# Altium PCB HBRIDGE_PCB.PcbDoc (part 1 of 2)
Units mm, origin at the board's own origin, x right, y up, seen from the top; angles counter-clockwise.
Board outline 96 x 74 mm, 4 copper layers (Top Layer, GND, VCC, Bottom Layer), stack 1.602 mm thick; 114 components, 69 nets, 304 pads, 210 vias.
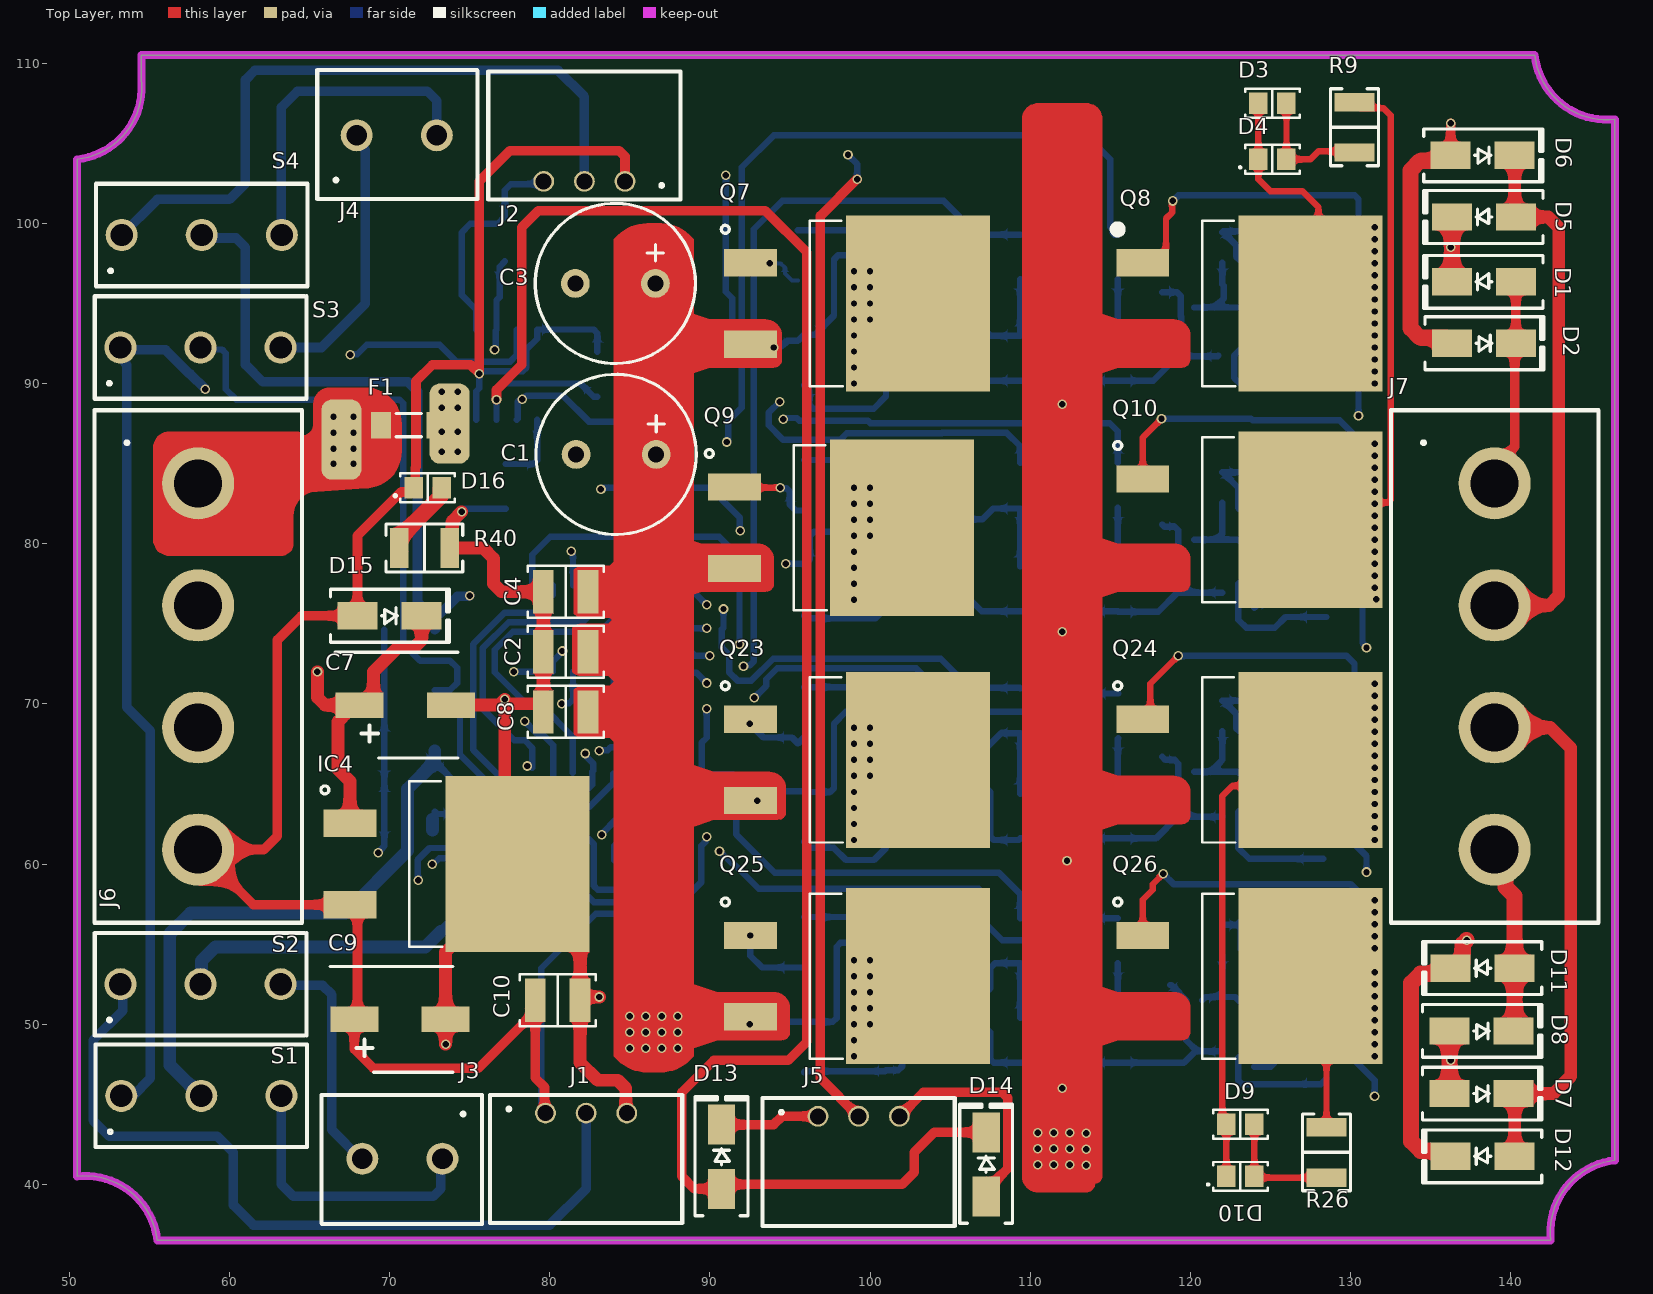
[diagram p0: Top Layer view]
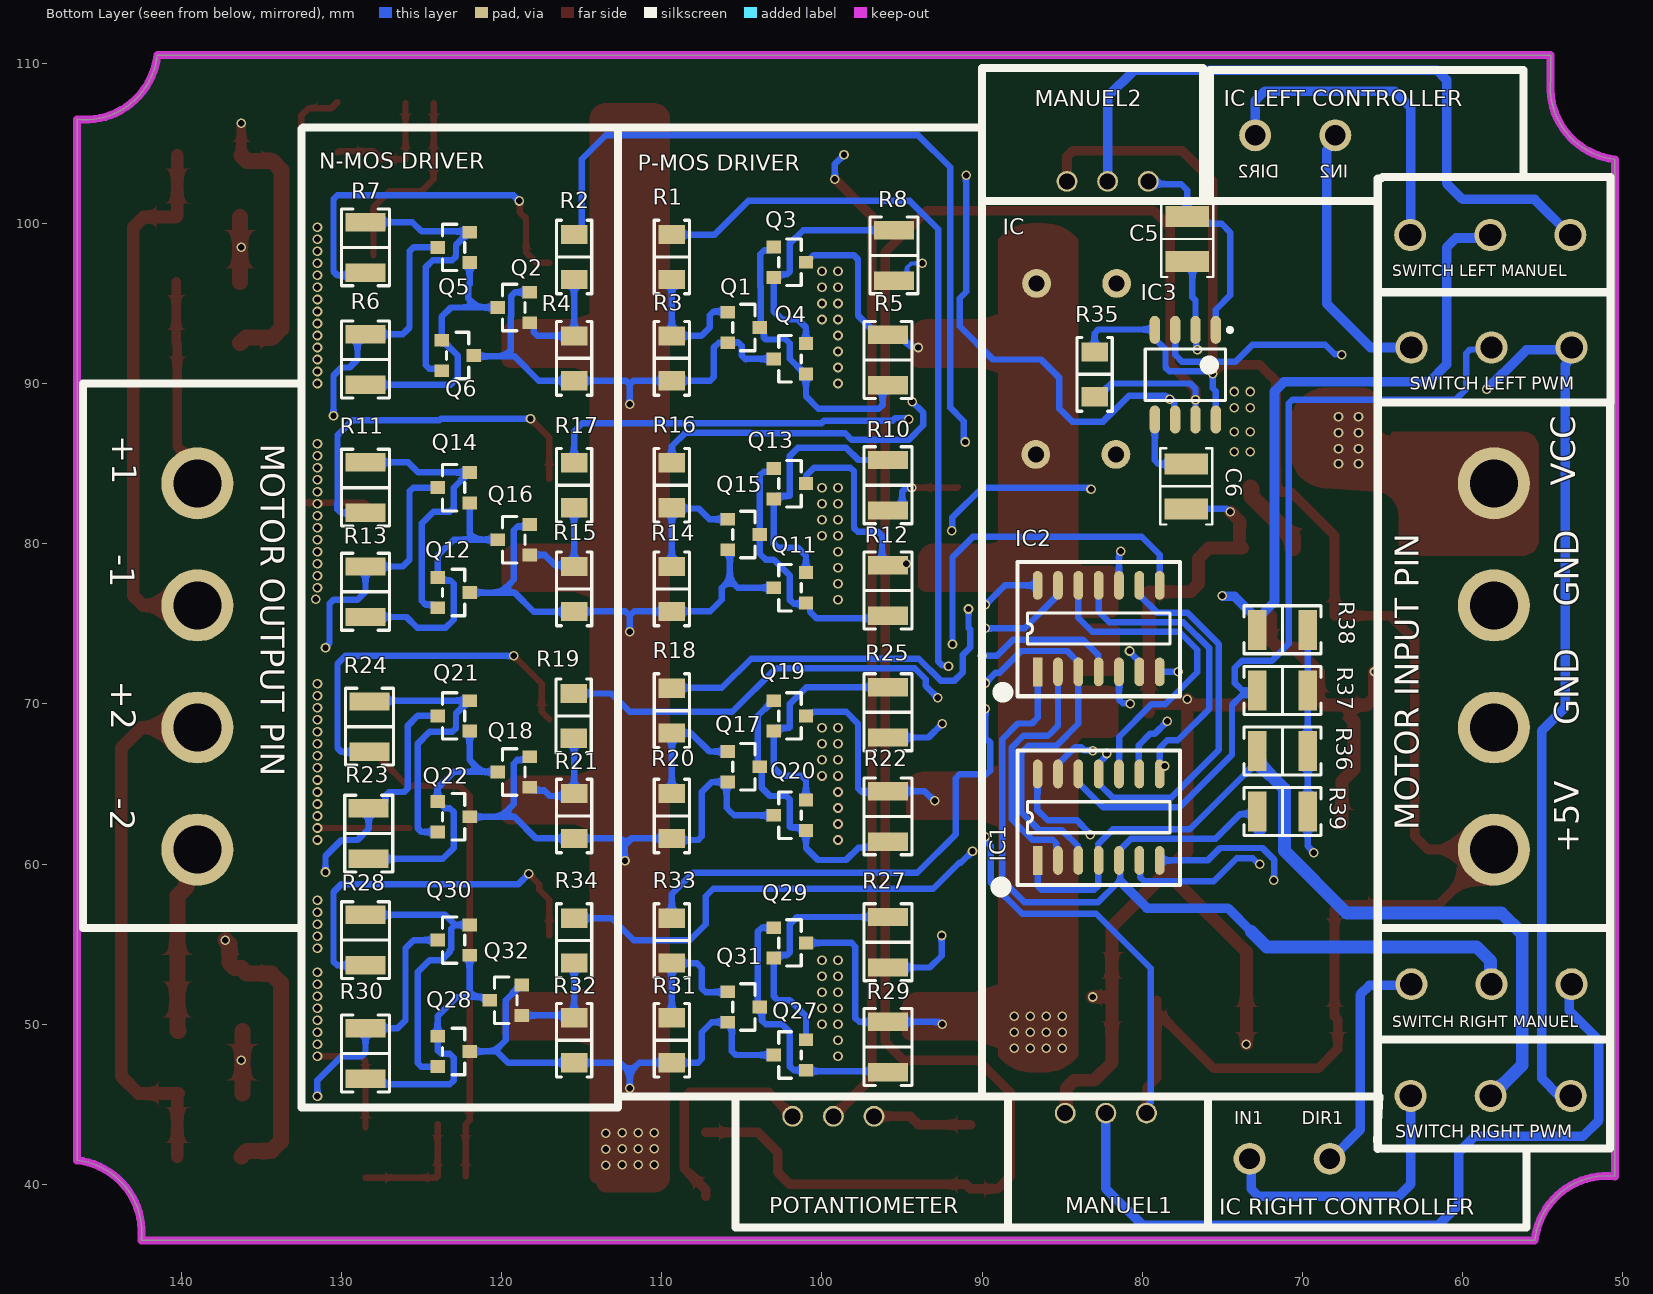
[diagram p1: Bottom Layer view, seen from below]
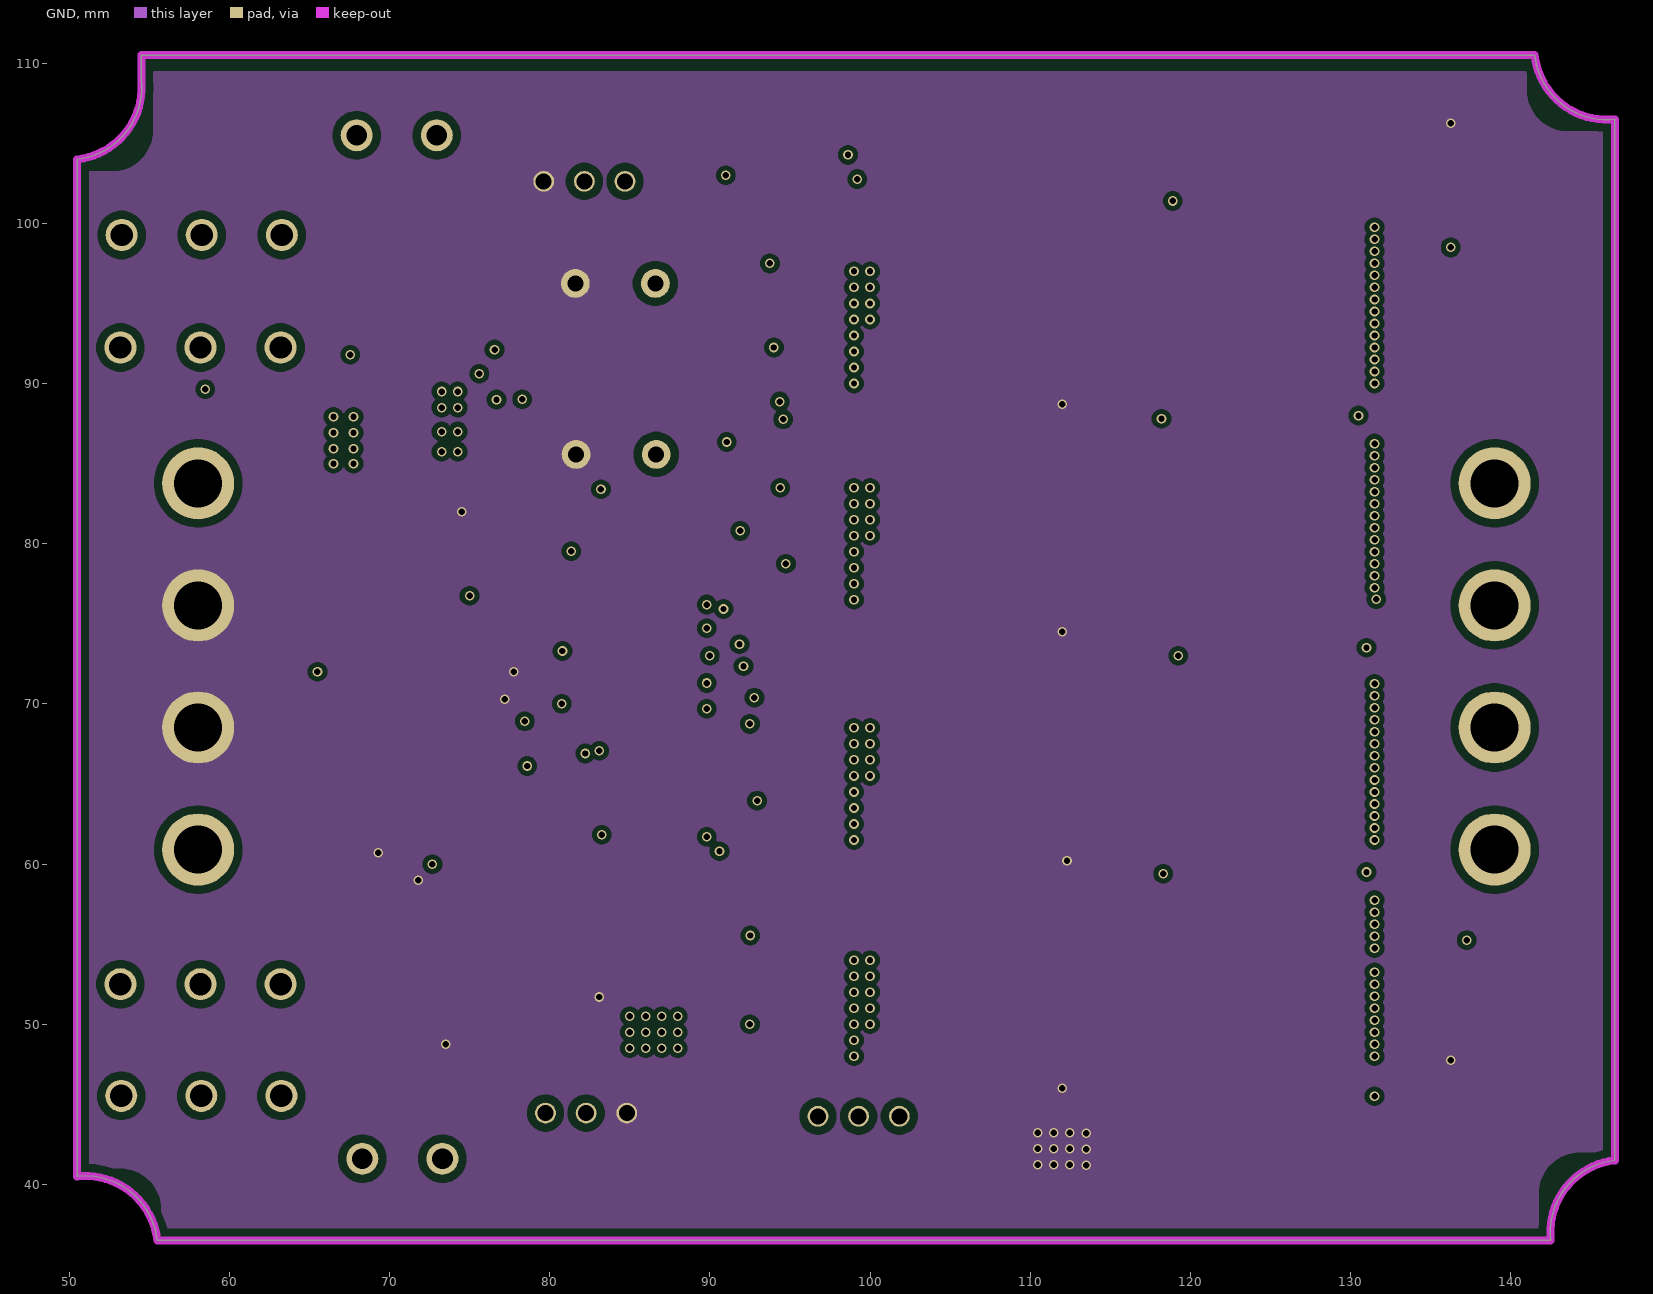
[diagram p2: GND]
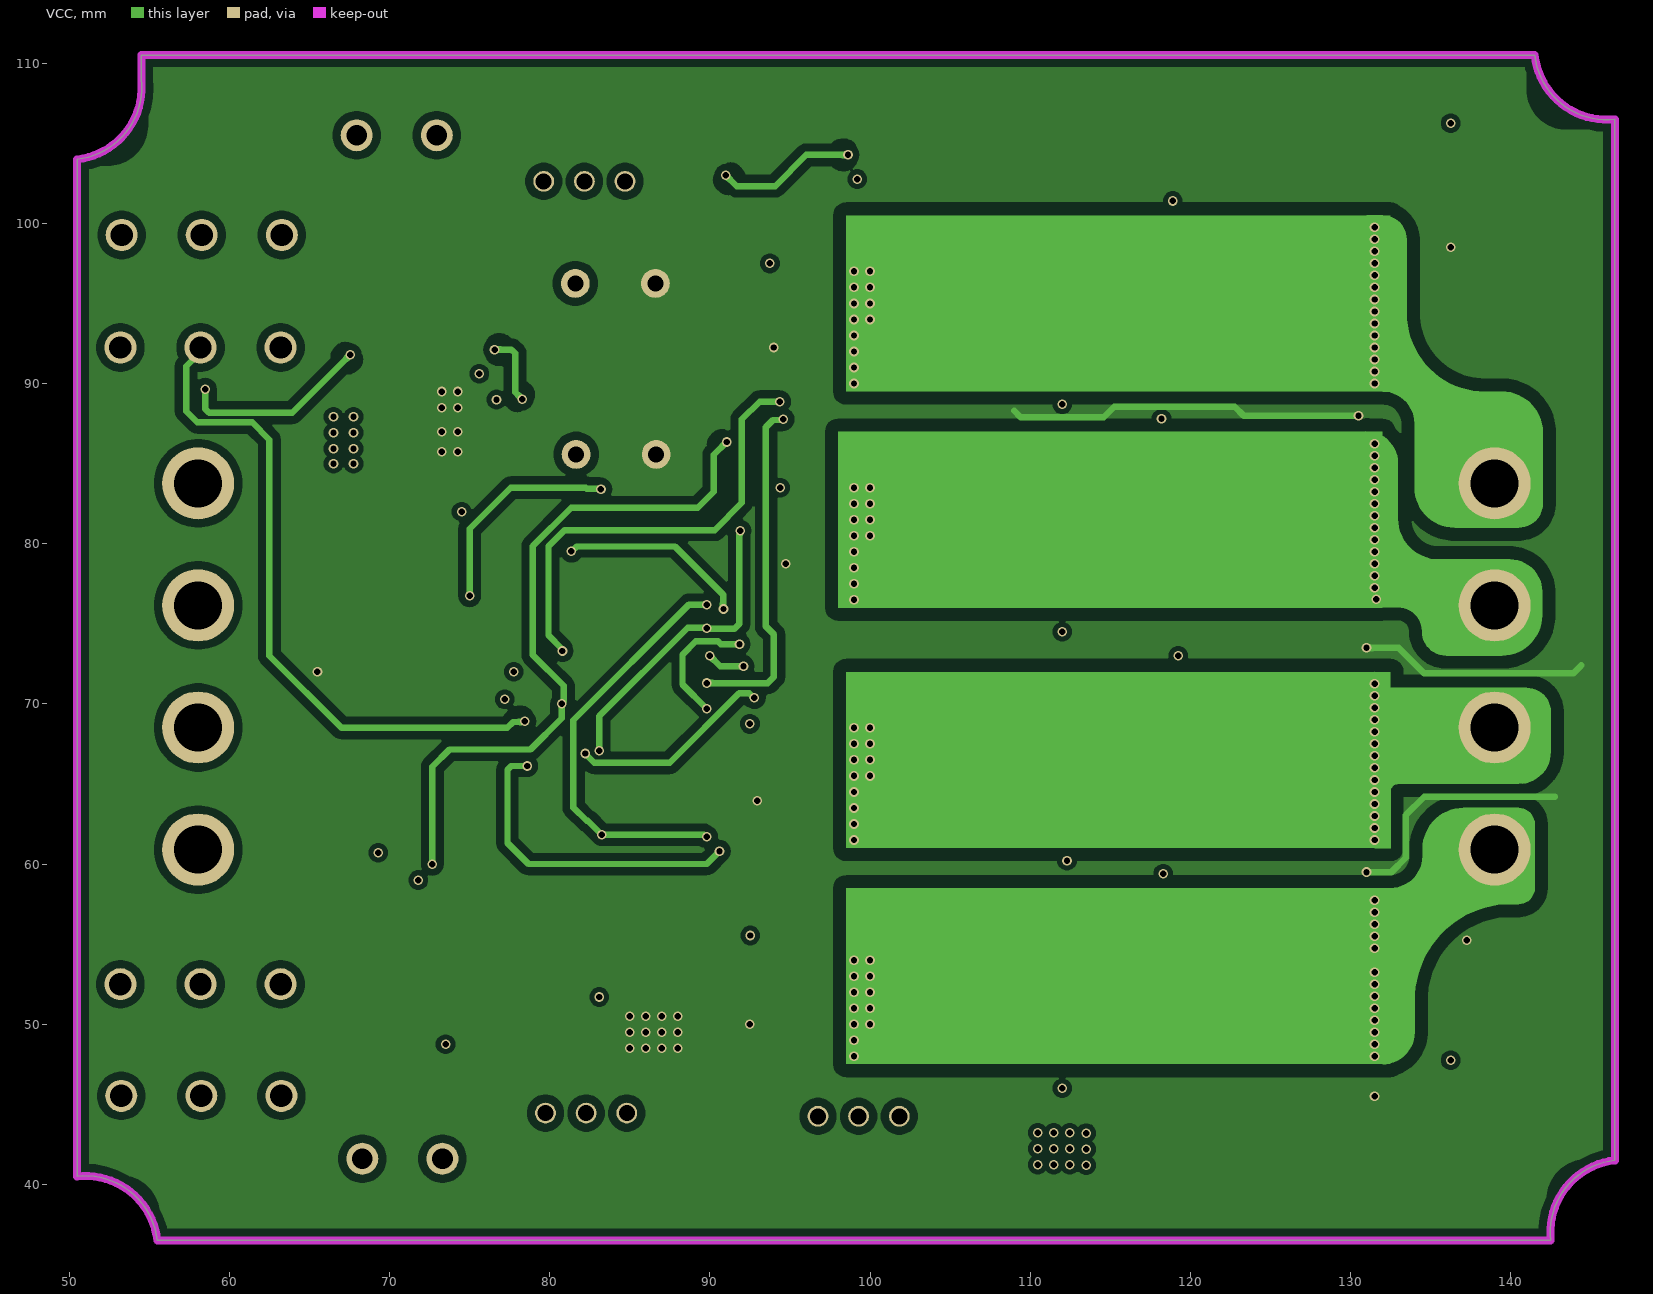
[diagram p3: VCC]
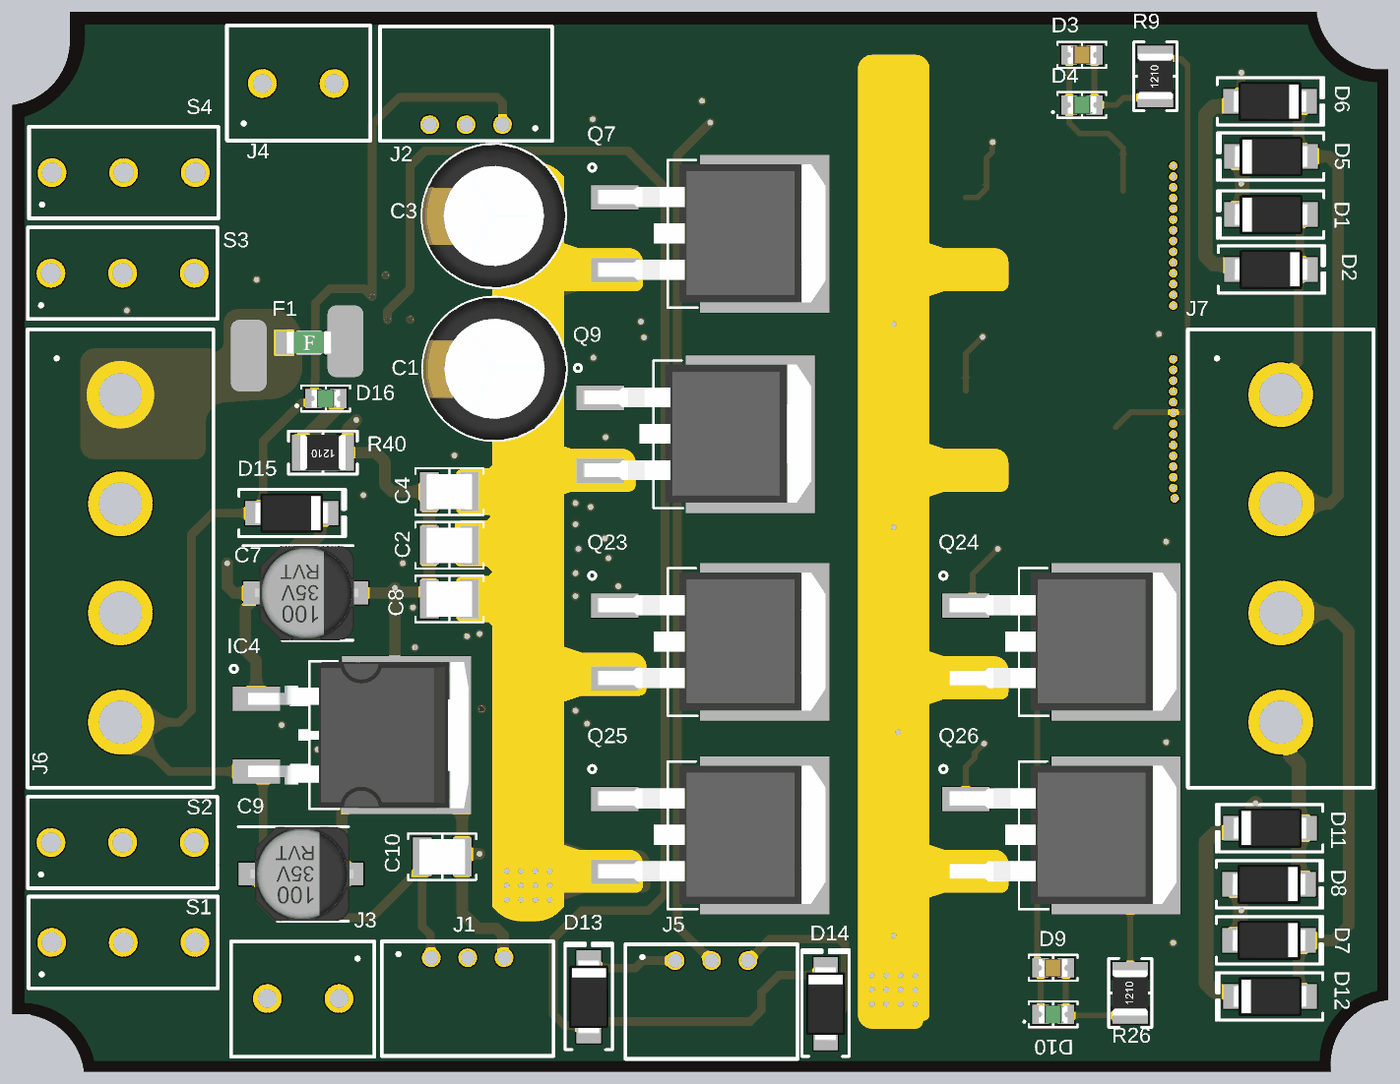
[diagram p5: 3D render of the assembled board from above, using the file's embedded part models]
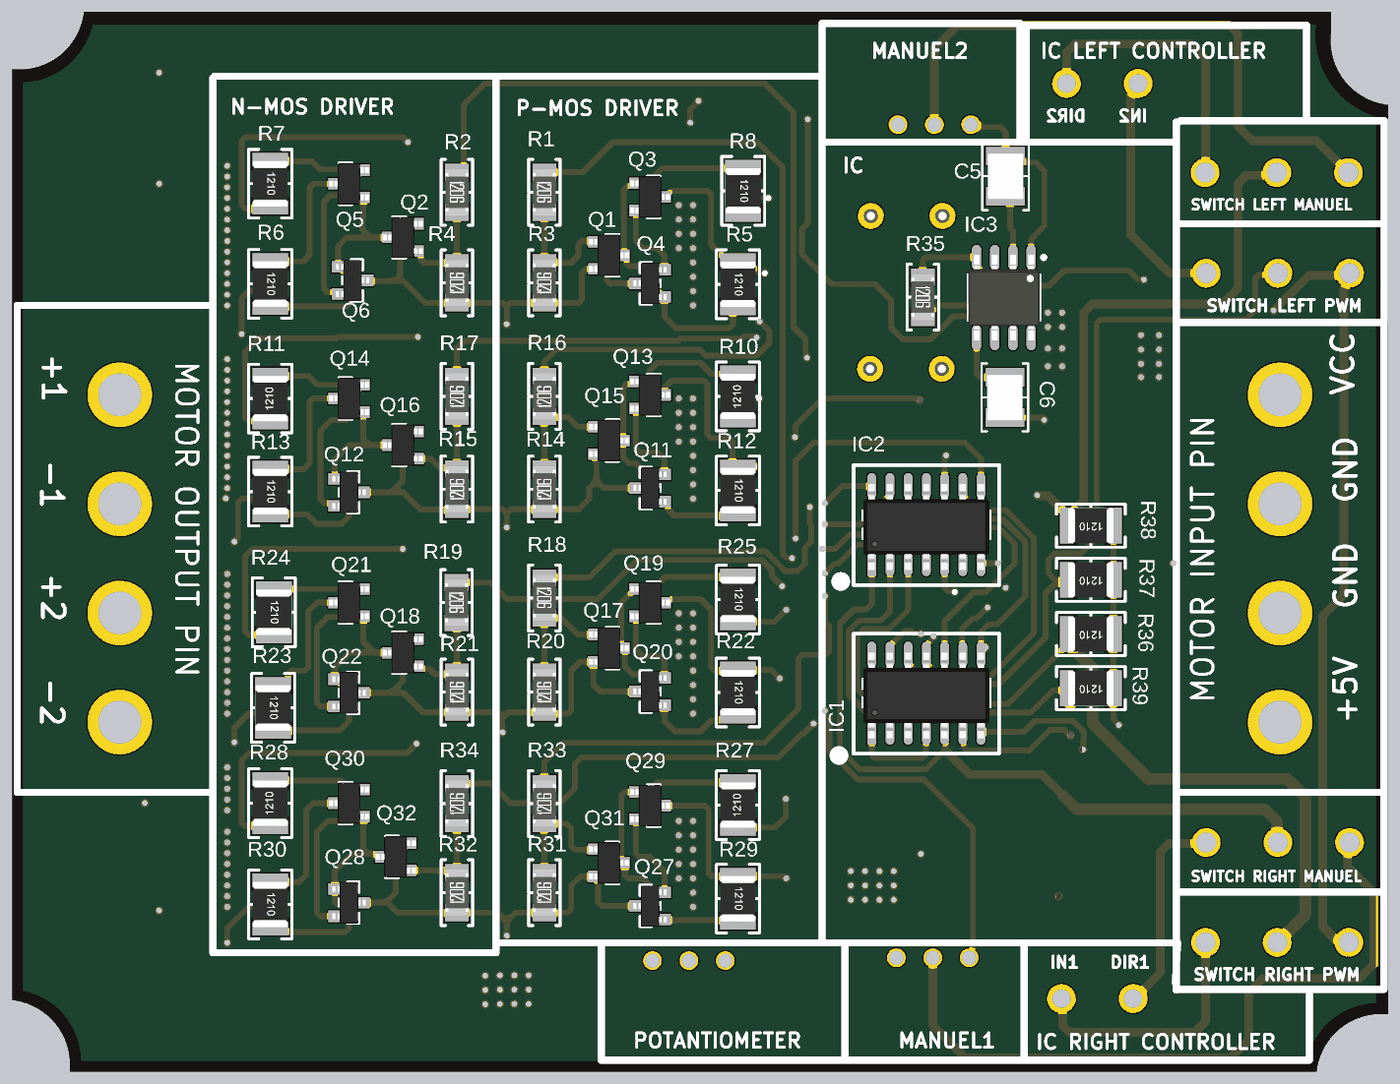
[diagram p6: 3D render of the assembled board from below, using the file's embedded part models]

## Layer stack, top to bottom
Top Solder: solder mask 0.0102, Solder Resist, Dk 3.5
Top Layer: signal copper 0.035
Dielectric 2: prepreg 0.2184, PP-023, Dk 4.4
GND: signal copper 0.0152
Dielectric 1: core 1.065, Core-042, Dk 4.6
VCC: signal copper 0.0152
Dielectric 3: prepreg 0.2184, PP-023, Dk 4.4
Bottom Layer: signal copper 0.035
Bottom Solder: solder mask 0.0102, Solder Resist, Dk 3.5

## Board outline
50.5,40.5 50.5,104 ccw(c50,108.5) 54.5,109 54.5,110.5 141.5,110.5 ccw(c146,111) 146.5,106.5 146.5,41.5 ccw(c147,37) 142.5,36.5 55.5,36.5 ccw(c51,36)

## Design rules (kind name [scope] priority, off if disabled: settings)
Clearance [All] p1: gap=0.2 ignorepadtopadclearanceinfootprint=FALSE except(0.127: SMDPad-SMDPad; 0.254: Arc-Via Track-Via Via-Via; 0.3: Via-Fill Via-Poly Via-Region; 0.35: Arc-THPad Track-THPad; 0.5: Arc-Fill Arc-Poly Arc-Region Track-Fill Track-Poly Track-Region SMDPad-Fill SMDPad-Poly SMDPad-Region THPad-THPad THPad-Fill THPad-Poly THPad-Region; 0.8: Fill-Fill Fill-Poly Fill-Region Poly-Poly Poly-Region Region-Region)
HoleSize [All] p1: absolutevalues=TRUE maxlimit=6.3 minlimit=0.3 maxpercent=80.000 minpercent=20.000
MinimumSolderMaskSliver [All] p1: minsoldermaskwidth=0.05
PlaneClearance [All] p1: clearance=1
PlaneConnect [All] p1: planeconnectstyle=Relief reliefexpansion=0.508 reliefentries=4 reliefconductorwidth=0.254 reliefairgap=5
PolygonConnect [All] p1: connectstyle=Direct reliefconductorwidth=0.7 reliefentries=4 polygonreliefangle="90 Angle" airgapwidth=1
RoutingVias [All] p1: holewidth=1.5 width=3 viastyle="Through Hole" minholewidth=0.3 minwidth=0.5 maxholewidth=6.3 maxwidth=6
SilkToSilkClearance [All vs IsText] p1: silktosilkclearance=0.08
SilkToSolderMaskClearance [IsText] p1: minsilkscreentomaskgap=0.08 clearancetoexposedcopper=TRUE
SolderMaskExpansion [All] p1: expansion=0.102 istentingtop=FALSE
UnRoutedNet [All] p1: checkbadconnections=TRUE
Width [All] p1: maxlimit=3 minlimit=0.2 preferedwidth=0.5 minimp=50.000000 maximp=50.000000 favimp=50.000000
23 further rules are at their usual default settings.

## Components (designator, comment, footprint, x,y, rotation, side; value= is the part's Value field where it differs from the comment)
C1 "35V 1000uF" "35V 1000uF" 86.65,85.575 r180 top
C2 "0.1 µF" "CAP 1210_3225 - 1MM" 81,73.25 r0 top
C3 "35V 1000uF" "35V 1000uF" 86.6,96.25 r180 top
C4 "0.1 µF" "CAP 1210_3225 - 1MM" 81,77 r0 top
C5 "0.1 µF" "CAP 1210_3225 - 1MM" 77.2,99.025 r270 bottom
C6 "0.1 µF" "CAP 1210_3225 - 1MM" 77.25,83.575 r90 bottom
C7 "Aluminum Cap" "Aluminum Cap" 68.125,69.925 r0 top
C8 "0.1 µF" "CAP 1210_3225 - 1MM" 81,69.5 r0 top
C9 "Aluminum Cap" "Aluminum Cap" 67.8,50.3 r0 top
C10 "0.1 µF" "CAP 1210_3225 - 1MM" 80.5,51.5 r180 top
D1 "IN4007" "DO214AC SMA" 138.325,96.35 r180 top
D2 "IN4007" "DO214AC SMA" 138.325,92.517 r0 top
D3 "Led" LED_RED 126,107.5 r180 top
D4 "LED_GREEN" LED_GREEN 124.25,104 r0 top
D5 "IN4007" "DO214AC SMA" 138.325,100.4 r180 top
D6 "IN4007" "DO214AC SMA" 138.25,104.25 r0 top
D7 "IN4007" "DO214AC SMA" 138.25,41.75 r180 top
D8 "IN4007" "DO214AC SMA" 138.183,45.667 r0 top
D9 "Led" LED_RED 124,43.75 r180 top
D10 "LED_GREEN" LED_GREEN 122.25,40.5 r0 top
D11 "IN4007" "DO214AC SMA" 138.25,53.5 r180 top
D12 "IN4007" "DO214AC SMA" 138.183,49.583 r0 top
D13 "IN4007" "DO214AC SMA" 90.725,41.725 r90 top
D14 "IN4007" "DO214AC SMA" 107.25,41.25 r90 top
D15 "IN4007" "DO214AC SMA" 70,75.5 r0 top
D16 "LED_GREEN" LED_GREEN 71.5,83.5 r0 top
F1 "30A" "FUSE 1206_3216 0.6MM" 71.2,87.4 r0 top
IC1 "74HC132" SOIC14 86.535,60.225 r90 bottom
IC2 "CD4069UBD" SOIC14 86.535,72 r90 bottom
IC3 "NE555" NE5532-SOIC8 75.41,93.344 r270 bottom
IC4 "L7805CD2T" L7805CD2T 67.528,62.54 r270 top
J1 "Switch" "JST-XH 2.54 - duplicate" 79.735,44.45 r0 top
J2 "Switch" "JST-XH 2.54 - duplicate" 84.705,102.625 r180 top
J3 "klemens1" Klemens 73.3,41.6 r180 top
J4 "klemens2" Klemens 67.95,105.5 r0 top
J5 "Pot" "JST-XH 2.54" 96.75,44.25 r0 top
J6 "Power klemens" "Power Klemens" 58.05,83.765 r270 top
J7 "Motor Klemens" "Power Klemens" 139,83.765 r270 top
Q1 "2N3904" "DIODES SOT-23-3" 104.875,93.5 r180 bottom
Q2 "2N3904" "DIODES SOT-23-3" 119.25,94.75 r0 bottom
Q3 "2N3904" "DIODES SOT-23-3" 102,97.575 r180 bottom
Q4 "2N3906S" SOT23-3 101.014,90.575 r0 bottom
Q5 "2N3904" "DIODES SOT-23-3" 123,98.5 r0 bottom
Q6 "2N3906S" SOT23-3 123.736,92.716 r180 bottom
Q7 "IRF4905" IRF4905 92.528,97.54 r270 top
Q8 "IRF3205S" IRF3205S 117.678,136.187 r270 top
Q9 "IRF4905" IRF4905 91.528,83.54 r270 top
Q10 "IRF3205S" IRF3205S 117.678,122.687 r270 top
Q11 "2N3906S" SOT23-3 101.014,76.284 r0 bottom
Q12 "2N3906S" SOT23-3 123.986,77.916 r180 bottom
Q13 "2N3904" "DIODES SOT-23-3" 102,83.75 r180 bottom
Q14 "2N3904" "DIODES SOT-23-3" 123,83.5 r0 bottom
Q15 "2N3904" "DIODES SOT-23-3" 104.875,80.575 r180 bottom
Q16 "2N3904" "DIODES SOT-23-3" 119.25,80.25 r0 bottom
Q17 "2N3904" "DIODES SOT-23-3" 104.875,66.075 r180 bottom
Q18 "2N3904" "DIODES SOT-23-3" 119.25,65.75 r0 bottom
Q19 "2N3904" "DIODES SOT-23-3" 102,69.25 r180 bottom
Q20 "2N3906S" SOT23-3 101.014,62.075 r0 bottom
Q21 "2N3904" "DIODES SOT-23-3" 123,69.25 r0 bottom
Q22 "2N3906S" SOT23-3 123.986,63.916 r180 bottom
Q23 "IRF4905" IRF4905 92.528,69.04 r270 top
Q24 "IRF3205S" IRF3205S 117.678,107.687 r270 top
Q25 "IRF4905" IRF4905 92.528,55.54 r270 top
Q26 "IRF3205S" IRF3205S 117.678,94.187 r270 top
Q27 "2N3906S" SOT23-3 101.014,47.109 r0 bottom
Q28 "2N3906S" SOT23-3 123.986,49.266 r180 bottom
Q29 "2N3904" "DIODES SOT-23-3" 102,55.075 r180 bottom
Q30 "2N3904" "DIODES SOT-23-3" 123,55.25 r0 bottom
Q31 "2N3904" "DIODES SOT-23-3" 104.875,51.075 r180 bottom
Q32 "2N3904" "DIODES SOT-23-3" 119.75,51.5 r0 bottom
R1 "1 kOhms" "RES 1206_3216" 109.375,97.9 r270 bottom
R2 "1 kOhms" "RES 1206_3216" 115.475,97.9 r270 bottom
R3 "10 kOhms" "RES 1206_3216" 109.375,91.575 r90 bottom
R4 "10 kOhms" "RES 1206_3216" 115.475,91.575 r90 bottom
R5 "10 kOhms" "RES 1210_3225" 95.875,91.475 r270 bottom
R6 "10 kOhms" "RES 1210_3225" 128.5,91.5 r270 bottom
R7 "10 kOhms" "RES 1210_3225" 128.5,98.5 r270 bottom
R8 "10 kOhms" "RES 1210_3225" 95.5,98 r270 bottom
R9 "1.5KOhms" "RES 1210_3225" 130.25,106 r90 top value="10 kOhms"
R10 "10 kOhms" "RES 1210_3225" 95.875,83.65 r90 bottom
R11 "10 kOhms" "RES 1210_3225" 128.5,83.5 r90 bottom
R12 "10 kOhms" "RES 1210_3225" 95.875,77.075 r270 bottom
R13 "10 kOhms" "RES 1210_3225" 128.5,77 r270 bottom
R14 "10 kOhms" "RES 1206_3216" 109.375,77.175 r90 bottom
R15 "10 kOhms" "RES 1206_3216" 115.475,77.175 r90 bottom
R16 "1 kOhms" "RES 1206_3216" 109.375,83.65 r90 bottom
R17 "1 kOhms" "RES 1206_3216" 115.475,83.65 r90 bottom
R18 "1 kOhms" "RES 1206_3216" 109.375,69.575 r270 bottom
R19 "1 kOhms" "RES 1206_3216" 115.5,69.25 r270 bottom
R20 "10 kOhms" "RES 1206_3216" 109.375,63 r90 bottom
R21 "10 kOhms" "RES 1206_3216" 115.475,63 r90 bottom
R22 "10 kOhms" "RES 1210_3225" 95.875,62.975 r270 bottom
R23 "10 kOhms" "RES 1210_3225" 128.3,61.9 r270 bottom
R24 "10 kOhms" "RES 1210_3225" 128.25,68.575 r270 bottom
R25 "10 kOhms" "RES 1210_3225" 95.875,69.475 r270 bottom
R26 "1.5KOhms" "RES 1210_3225" 128.5,42 r90 top value="10 kOhms"
R27 "10 kOhms" "RES 1210_3225" 95.875,55.118 r90 bottom
R28 "10 kOhms" "RES 1210_3225" 128.5,55.25 r90 bottom
R29 "10 kOhms" "RES 1210_3225" 95.875,48.575 r270 bottom
R30 "10 kOhms" "RES 1210_3225" 128.5,48.175 r270 bottom
R31 "10 kOhms" "RES 1206_3216" 109.375,49 r90 bottom
R32 "10 kOhms" "RES 1206_3216" 115.475,49 r90 bottom
R33 "1 kOhms" "RES 1206_3216" 109.375,55.218 r90 bottom
R34 "1 kOhms" "RES 1206_3216" 115.475,55.218 r90 bottom
R35 "1 kOhms" "RES 1206_3216" 82.975,90.575 r270 bottom
R36 "10 kOhms" "RES 1210_3225" 71.25,67.058 r0 bottom
R37 "10 kOhms" "RES 1210_3225" 71.25,70.842 r0 bottom
R38 "10 kOhms" "RES 1210_3225" 71.25,74.625 r0 bottom
R39 "10 kOhms" "RES 1210_3225" 71.25,63.275 r0 bottom
R40 "330 Ohms" "RES 1210_3225" 72.175,79.725 r180 top
S1 "SPDT Slide" SPDT 53.25,45.525 r0 top
S2 "SPDT Slide" SPDT 53.2,52.5 r0 top
S3 "SPDT Slide" SPDT 53.2,92.25 r0 top
S4 "SPDT Slide" SPDT 53.275,99.275 r0 top

## Footprints (in the part's own frame and the unit in brackets; to place one, negate y for a bottom-side part, rotate by r counter-clockwise, add the part's x,y. Pads: shape width x height; smd on the part's side, far side on the other; paste and mask are expansions set on the pad)
"35V 1000uF" [mm]
  round 1.8 hole 1: 1(0,0) 2(5,0)
  silkscreen extent -2.5,-5 7.5,5, body extent -2.5,-5 7.5,5, height 20
"Aluminum Cap" [mm]
  rect 3x1.6 smd: 1(0,0) 2(5.7,0)
  silkscreen extent -1.53,-3.3 6.15,3.3, body extent -0.68,-3.3 6.52,3.3, height 7.71
"CAP 1210_3225 - 1MM" [mm] "Chip Capacitor, 2-Leads, Body 3.20x2.50mm, IPC Medium Density"
  rect 1.3x2.7 smd: 1(-1.4,0) 2(1.4,0)
  silkscreen extent -2.37,-1.63 2.37,1.63, body extent -1.6,-1.25 1.6,1.25, height 1
"DIODES SOT-23-3" [mm] "SOT23, 3-Leads, Body 2.90x2.40mm, Pitch 0.95mm, IPC Medium Density"
  rect 0.9x0.8 smd: 1(-1,0.95) 2(-1,-0.95) 3(1,0)
  silkscreen extent -0.7,-1.45 0.7,1.45, body extent -1.41,-1.45 1.41,1.45, height 1.5
"DO214AC SMA" [mm] "Molded Diode, 2-Leads, Body 4.30x2.60mm, IPC Medium Density"
  rect 2.5x1.7 smd: 1(-2,0) 2(2,0)
  silkscreen extent -3.68,-1.65 3.75,1.65, body extent -2.6,-1.37 2.6,1.37, height 2.4
"FUSE 1206_3216 0.6MM" [mm] "Chip Fuse 1.5A AC 63V DC, 2-Leads, Body 3.10x1.55mm, IPC Medium Densitym"
  rect 1.25x1.65 smd: 1(-1.725,0) 2(1.725,0)
  silkscreen extent -0.8,-0.72 0.8,0.72, body extent -1.55,-0.77 1.55,0.78, height 0.76
IRF3205S [mm]
  rect 1.7x3.3 smd paste+0 mask+0.051: 1(38.647,-0.65)
  rect 11x9 smd paste+0 mask+0.051: 2(41.187,9.822)
  rect 1.7x3.3 on Top Solder paste+0 mask+0.051: 3(43.727,-0.65)
  silkscreen extent 36.03,-2.46 46.34,5.13, body extent 36.32,-1.83 45.97,14.05, height 4.07
IRF4905 [mm]
  rect 1.7x3.3 smd paste+0 mask+0.051: 1(0,0) 3(5.08,0)
  rect 11x9 smd paste+0 mask+0.051: 2(2.54,10.472)
  silkscreen extent -2.62,-1.81 7.7,5.78, body extent -2.32,-1.18 7.33,14.7, height 4.07
"JST-XH 2.54" [mm]
  round 1.3 hole 1: 1(0,0) 2(2.54,0) 3(5.08,0)
  silkscreen extent -3.46,-6.86 8.54,1.14
"JST-XH 2.54 - duplicate" [mm]
  round 1.3 hole 1: 1(0,0) 2(2.54,0) 3(5.08,0)
  silkscreen extent -3.46,-6.86 8.54,1.14
Klemens [mm]
  round 2 hole 1.3: 1(0,0) 2(5,0)
  silkscreen extent -2.46,-3.99 7.54,4.06
L7805CD2T [mm]
  rect 1.7x3.3 smd paste+0 mask+0.051: 1(0,0) 3(5.08,0)
  rect 11x9 smd paste+0 mask+0.051: 2(2.54,10.472)
  silkscreen extent -2.62,-1.81 7.7,5.78, body extent -2.56,-0.6 7.64,14.82, height 4.61
LED_GREEN [mm]
  rect 1.15x1.35 smd: 1(0,0) 2(1.75,0)
  silkscreen extent -1.18,-0.9 2.57,0.9, body extent -0.13,-0.63 1.88,0.63, height 0.8
LED_RED [mm]
  rect 1.15x1.35 smd: 1(0,0) 2(1.75,0)
  silkscreen extent -0.82,-0.9 2.57,0.9, body extent -0.13,-0.63 1.88,0.63, height 0.8
NE5532-SOIC8 [mm] "SOIC, 8-Leads, Body 4,91x3,91mm, Pitch 1,27mm, IPC Medium Density"
  oval 1.75x0.65 smd: 1(-0.006,0) 2(-0.006,-1.27) 3(-0.006,-2.54) 4(-0.006,-3.81) 5(5.594,-3.81) 6(5.594,-2.54) 7(5.594,-1.27) 8(5.594,0)
  silkscreen extent -0.13,-4.41 4.39,1, body extent -0.21,-4.41 5.79,0.6, height 1.75
"Power Klemens" [mm]
  round 4.5 hole 3: 1(0,0) 2(7.62,0) 3(15.24,0) 4(22.86,0)
  silkscreen extent -4.57,-6.48 27.43,6.48
"RES 1206_3216" [mm] "Chip Resistor, 2-Leads, Body 3.13x1.55mm, IPC Medium Density"
  rect 1.2x1.65 smd: 1(-1.4,0) 2(1.4,0)
  silkscreen extent -2.3,-1.1 2.3,1.1, body extent -1.6,-0.8 1.6,0.8, height 0.6
"RES 1210_3225" [mm] "Chip Resistor, 2-Leads, Body 3.1x2.6mm, IPC Medium Density"
  rect 1.15x2.5 smd: 1(-1.575,0) 2(1.575,0)
  silkscreen extent -2.4,-1.5 2.4,1.5, body extent -1.6,-1.25 1.6,1.25, height 0.7
SOIC14 [mm]
  rect 1.8x0.6 smd: 1(0,0)
  oval 1.8x0.6 smd: 2(0,-1.27) 3(0,-2.54) 4(0,-3.81) 5(0,-5.08) 6(0,-6.35) 7(0,-7.62) 8(5.4,-7.62) 9(5.4,-6.35) 10(5.4,-5.08) 11(5.4,-3.81) 12(5.4,-2.54) 13(5.4,-1.27) 14(5.4,0)
  silkscreen extent -1.52,-8.89 6.86,1.27, body extent -0.46,-8.21 5.54,0.59, height 1.7
SOT23-3 [mm]
  rect 0.9x0.8 smd: 1(-0.014,-0.016) 2(-0.014,-1.916) 3(1.986,-0.966)
  silkscreen extent 0.29,-2.42 1.69,0.48, body extent -0.17,-2.42 2.15,0.48, height 1
SPDT [mm]
  round 2 hole 1.4: 1(0,0) 2(5,0) 3(10,0)
  silkscreen extent -1.6,-3.2 11.6,3.2

## Part data
C2 C4 C5 C6 C8 C10: library part 1210Y0500104KST, "1210 50VDC 100NF 10% X7R(2R1) AE", Device Package="1210 (3225 Metric)", manufacturer="Knowles Syfer", Operating Temperature="-55°C ~ 125°C", Ratings=AEC-Q200, Supplier Part Number 1=1608-1210Y0500104KSTCT-ND, Temperature Coefficient="X7R (2R1)", Tolerance=±10%, Voltage - Rated=50V, Applications="Automotive, Boardflex Sensitive", Capacitance="0.1 µF", componentlink2description="DigiKey Link", componentlink2url=https://www.digikey.com/en/products/detail/knowles-syfer/1210Y0500104KST/18879780, Features="Soft Termination", Lifecycle Status=Active, Minimum Order=1, Mounting Type="Surface Mount, MLCC", Package / Case="1210 (3225 Metric)", packaging=TapeAndReel, Part Number=1210Y0500104KST, Part Status=Active, partid=53037, price=0.16, series=FlexiCap™, Size / Dimension="0.126\" L x 0.098\" W (3.20mm x 2.50mm)", Supplier 1=DigiKey, Thickness (Max)="0.079\" (2.00mm)"
  C2 C4: lastupdated="4.12.2023 20:40:02"
  C5 C6: lastupdated="18.12.2023 20:42:16"
  C8 C10: lastupdated="5.12.2023 20:39:07"
D1 D2 D5 D6 D7 D8 D11 D12 D13 D14 D15: library part RS1A, "DIODE GEN PURP 50V 1A SMA", Capacitance @ Vr, F="10pF @ 4V, 1MHz", Current - Average Rectified (Io)=1A, Current - Reverse Leakage @ Vr="5µA @ 50V", manufacturer="ON Semiconductor", Operating Temperature - Junction="-55°C ~ 150°C", Package / Case="DO-214AC, SMA", Supplier Device Package="SMA (DO-214AC)", Supplier Part Number 1=RS1ACT-ND, Voltage - DC Reverse (Vr) (Max)=50V, Voltage - Forward (Vf) (Max) @ If="1.3V @ 1A", componentlink1description=Datasheet, componentlink1url=https://www.onsemi.com/pub/Collateral/RS1M-D.PDF, componentlink2description="DigiKey Link", componentlink2url=http://digikey.com/product-detail/en/on-semiconductor/RS1A/RS1ACT-ND/3504478, Diode Type=Standard, lastupdated="4.12.2023 21:20:44", Lifecycle Status=Active, Minimum Order=1, Mounting Type="Surface Mount", packaging=TapeAndReel, Part Number=RS1A, Part Status=Active, partid=585, price=0.08, Reverse Recovery Time (trr)=150ns, series=-, Speed="Fast Recovery =< 500ns, > 200mA (Io)", Supplier 1=DigiKey
D3 D9: library part LED_RED_1
F1: library part 3413.0120.22, "FUSE BOARD MNT 2.5A 32VAC 63VDC", Breaking Capacity @ Rated Voltage=50A, Current Rating (Amps)=2.5A, Device Package="1206 (3216 Metric)", manufacturer="Schurter Inc.", Operating Temperature="-55°C ~ 90°C", Supplier Part Number 1=486-1681-1-ND, Voltage Rating - AC=32V, Voltage Rating - DC=63V, Approval Agency=cURus, Approvals=cURus, componentlink1description=Datasheet, componentlink1url=http://www.schurterinc.com/bundles/snceschurter/epim/_ProdPool_/newDS/en/typ_USF_1206.pdf, componentlink2description="DigiKey Link", componentlink2url=http://digikey.com/product-detail/en/schurter-inc/3413.0120.22/486-1681-1-ND/2870086, Fuse Type="Board Mount (Cartridge Style Excluded)", lastupdated="2.09.2020 01:30:41", Lifecycle Status=Active, Melting I²t=0.35, Minimum Order=1, Mounting Type="Surface Mount", Package / Case="1206 (3216 Metric)", packaging=TapeAndReel, Part Number=3413.0120.22, Part Status=Active, price=0.24, Response Time="Fast Blow", series="USF 1206", Size / Dimension="0.126\" L x 0.063\" W x 0.024\" H (3.20mm x 1.60mm x 0.60mm)", Supplier 1=DigiKey
J1 J2: library part switch
Q1 Q2 Q3 Q5 Q13 Q14 Q15 Q16 Q17 Q18 Q19 Q21 Q29 Q30 Q31 Q32: library part MMBT3904-7-F, "2N3904 Npn Smd Transistör Sot-23", Current - Collector (Ic) (Max)="200 mA", Current - Collector Cutoff (Max)="50nA (ICBO)", DC Current Gain (hFE) (Min) @ Ic, Vce="100 @ 10mA, 1V", Frequency - Transition=300MHz, manufacturer="Diodes Incorporated", Operating Temperature="-55°C ~ 150°C (TJ)", Package / Case="TO-236-3, SC-59, SOT-23-3", Power - Max="300 mW", Supplier Device Package=SOT-23-3, Supplier Part Number 1=MMBT3904-FDICT-ND, Voltage - Collector Emitter Breakdown (Max)="40 V", componentlink1description=Datasheet, componentlink1url=https://www.diodes.com/assets/Datasheets/ds30036.pdf, componentlink2description="DigiKey Link", componentlink2url=https://www.digikey.com/en/products/detail/diodes-incorporated/MMBT3904-7-F/814494, lastupdated="4.12.2023 21:46:05", Lifecycle Status=Active, Minimum Order=1, Mounting Type="Surface Mount", packaging=TapeAndReel, Part Number=MMBT3904-7-F, Part Status=Active, partid=85, price=0.01, series=-, Supplier 1=DigiKey, Transistor Type=NPN, Vce Saturation (Max) @ Ib, Ic="300mV @ 5mA, 50mA"
R1 R2 R16 R17 R18 R19 R33 R34 R35: library part RNCS1206BKE1K00, "RES 1K OHM 0.1% 1/8W 1206", Device Package="1206 (3216 Metric)", manufacturer="Stackpole Electronics Inc", Operating Temperature="-55°C ~ 155°C", Power (Watts)="0.125W, 1/8W", Ratings=AEC-Q200, Supplier Device Package=1206, Supplier Part Number 1=RNCS1206BKE1K00CT-ND, Temperature Coefficient=±25ppm/°C, Tolerance=±0.1%, componentlink1description=Datasheet, componentlink1url=https://www.seielect.com/catalog/sei-rncs_rnch.pdf, componentlink2description="DigiKey Link", componentlink2url=https://www.digikey.com/en/products/detail/stackpole-electronics-inc/RNCS1206BKE1K00/1800333, Composition="Thin Film", Features="Anti-Corrosive, Automotive AEC-Q200, Moisture Resistant", Height - Seated (Max)="0.026\" (0.65mm)", Lifecycle Status=Active, Minimum Order=1, Number of Terminations=2, Package / Case="1206 (3216 Metric)", packaging=TapeAndReel, Part Number=RNCS1206BKE1K00, Part Status=Active, partid=26856, price=0.08, Resistance="1 kOhms", series=RNCS, Size / Dimension="0.120\" L x 0.061\" W (3.05mm x 1.55mm)", Supplier 1=DigiKey
  R1 R2 R16 R17 R18 R19 R33 R34: lastupdated="4.12.2023 20:49:28"
  R35: lastupdated="8.12.2023 20:55:21"
R3 R4 R14 R15 R20 R21 R31 R32: library part CRG1206F10K, "RES SMD 10K OHM 1% 1/4W 1206", Device Package="1206 (3216 Metric)", manufacturer="TE Connectivity Passive Product", Operating Temperature="-55°C ~ 155°C", Power (Watts)="0.25W, 1/4W", Supplier Device Package=1206, Supplier Part Number 1=A106069CT-ND, Temperature Coefficient=±100ppm/°C, Tolerance=±1%, componentlink1description=Datasheet, componentlink1url=https://www.te.com/commerce/DocumentDelivery/DDEController?Action=srchrtrv&DocNm=1773204&DocType=DS&DocLang=English, componentlink2description="DigiKey Link", componentlink2url=https://www.digikey.com/en/products/detail/te-connectivity-passive-product/CRG1206F10K/2389909, Composition="Thick Film", Height - Seated (Max)="0.026\" (0.65mm)", lastupdated="10.12.2023 20:48:33", Lifecycle Status=Active, Minimum Order=1, Number of Terminations=2, Package / Case="1206 (3216 Metric)", packaging=TapeAndReel, Part Number=CRG1206F10K, Part Status=Active, partid=26989, price=0.01, Resistance="10 kOhms", series="CRG, Neohm", Size / Dimension="0.122\" L x 0.061\" W (3.10mm x 1.55mm)", Supplier 1=DigiKey
R5 R6 R12 R13 R22 R23 R29 R30: library part CRCW121010K0JNEAHP, "RES SMD 10K OHM 5% 3/4W 1210", Device Package="1210 (3225 Metric)", manufacturer="Vishay Dale", Operating Temperature="-55°C ~ 155°C", Power (Watts)="0.75W, 3/4W", Ratings=AEC-Q200, Supplier Device Package=1210, Supplier Part Number 1=541-10KNCT-ND, Temperature Coefficient=±200ppm/°C, Tolerance=±5%, componentlink1description=Datasheet, componentlink1url=http://www.vishay.com/docs/20043/crcwhpe3.pdf, componentlink2description="DigiKey Link", componentlink2url=https://www.digikey.com/en/products/detail/vishay-dale/CRCW121010K0JNEAHP/2567300, Composition="Thick Film", Features="Automotive AEC-Q200, Pulse Withstanding", Height - Seated (Max)="0.028\" (0.70mm)", lastupdated="4.12.2023 21:41:47", Lifecycle Status=Active, Minimum Order=1, Number of Terminations=2, Package / Case="1210 (3225 Metric)", packaging=TapeAndReel, Part Number=CRCW121010K0JNEAHP, Part Status=Active, price=0.12, Resistance="10 kOhms", series=CRCW-HP, Size / Dimension="0.126\" L x 0.098\" W (3.20mm x 2.50mm)", Supplier 1=DigiKey
R7 R8 R10 R11 R24 R25 R27 R28 R36 R37 R38 R39: library part RMCF1210FT10K0, "RES 10K OHM 1% 1/2W 1210", Device Package="1210 (3225 Metric)", manufacturer="Stackpole Electronics Inc", Operating Temperature="-55°C ~ 155°C", Power (Watts)="0.5W, 1/2W", Ratings=AEC-Q200, Supplier Device Package=1210, Supplier Part Number 1=RMCF1210FT10K0CT-ND, Temperature Coefficient=±100ppm/°C, Tolerance=±1%, componentlink1description=Datasheet, componentlink1url=https://www.seielect.com/catalog/sei-rmcf_rmcp.pdf, componentlink2description="DigiKey Link", componentlink2url=https://www.digikey.com/en/products/detail/stackpole-electronics-inc/RMCF1210FT10K0/1758528, Composition="Thick Film", Features="Automotive AEC-Q200", Height - Seated (Max)="0.028\" (0.70mm)", Lifecycle Status=Active, Minimum Order=1, Number of Terminations=2, Package / Case="1210 (3225 Metric)", packaging=TapeAndReel, Part Number=RMCF1210FT10K0, Part Status=Active, price=0.01, Resistance="10 kOhms", series=RMCF, Size / Dimension="0.126\" L x 0.098\" W (3.20mm x 2.50mm)", Supplier 1=DigiKey
  R7 R8 R10 R11 R24 R25 R27 R28: lastupdated="10.12.2023 21:39:36"
  R36 R37 R38 R39: lastupdated="17.12.2023 21:51:18"
R9: library part RMCF1210FT10K0, "RES 1.5K OHM 1% 1/2W 1210", Device Package="1210 (3225 Metric)", manufacturer="Stackpole Electronics Inc", Operating Temperature="-55°C ~ 155°C", Power (Watts)="0.5W, 1/2W", Ratings=AEC-Q200, Resistance="10 kOhms", Supplier Device Package=1210, Supplier Part Number 1=RMCF1210FT10K0CT-ND, Temperature Coefficient=±100ppm/°C, Tolerance=±1%, componentlink1description=Datasheet, componentlink1url=https://www.seielect.com/catalog/sei-rmcf_rmcp.pdf, componentlink2description="DigiKey Link", componentlink2url=https://www.digikey.com/en/products/detail/stackpole-electronics-inc/RMCF1210FT10K0/1758528, Composition="Thick Film", Features="Automotive AEC-Q200", Height - Seated (Max)="0.028\" (0.70mm)", lastupdated="4.12.2023 21:41:44", Lifecycle Status=Active, Minimum Order=1, Number of Terminations=2, Package / Case="1210 (3225 Metric)", packaging=TapeAndReel, Part Number=RMCF1210FT10K0, Part Status=Active, price=0.01, series=RMCF, Size / Dimension="0.126\" L x 0.098\" W (3.20mm x 2.50mm)", Supplier 1=DigiKey
R26: library part RMCF1210FT10K0, "RES 10K OHM 1% 1/2W 1210", Device Package="1210 (3225 Metric)", manufacturer="Stackpole Electronics Inc", Operating Temperature="-55°C ~ 155°C", Power (Watts)="0.5W, 1/2W", Ratings=AEC-Q200, Resistance="10 kOhms", Supplier Device Package=1210, Supplier Part Number 1=RMCF1210FT10K0CT-ND, Temperature Coefficient=±100ppm/°C, Tolerance=±1%, componentlink1description=Datasheet, componentlink1url=https://www.seielect.com/catalog/sei-rmcf_rmcp.pdf, componentlink2description="DigiKey Link", componentlink2url=https://www.digikey.com/en/products/detail/stackpole-electronics-inc/RMCF1210FT10K0/1758528, Composition="Thick Film", Features="Automotive AEC-Q200", Height - Seated (Max)="0.028\" (0.70mm)", lastupdated="4.12.2023 21:41:44", Lifecycle Status=Active, Minimum Order=1, Number of Terminations=2, Package / Case="1210 (3225 Metric)", packaging=TapeAndReel, Part Number=RMCF1210FT10K0, Part Status=Active, price=0.01, series=RMCF, Size / Dimension="0.126\" L x 0.098\" W (3.20mm x 2.50mm)", Supplier 1=DigiKey
R40: library part RMCF1210FT330R, "RES 330 OHM 1% 1/2W 1210", Device Package="1210 (3225 Metric)", manufacturer="Stackpole Electronics Inc", Operating Temperature="-55°C ~ 155°C", Power (Watts)="0.5W, 1/2W", Ratings=AEC-Q200, Supplier Device Package=1210, Supplier Part Number 1=RMCF1210FT330RCT-ND, Temperature Coefficient=±100ppm/°C, Tolerance=±1%, componentlink1description=Datasheet, componentlink1url=https://www.seielect.com/catalog/sei-rmcf_rmcp.pdf, componentlink2description="DigiKey Link", componentlink2url=https://www.digikey.com/en/products/detail/stackpole-electronics-inc/RMCF1210FT330R/1715564, Composition="Thick Film", Features="Automotive AEC-Q200", Height - Seated (Max)="0.028\" (0.70mm)", lastupdated="17.12.2023 21:51:11", Lifecycle Status=Active, Minimum Order=1, Number of Terminations=2, Package / Case="1210 (3225 Metric)", packaging=TapeAndReel, Part Number=RMCF1210FT330R, Part Status=Active, price=0.01, Resistance="330 Ohms", series=RMCF, Size / Dimension="0.126\" L x 0.098\" W (3.20mm x 2.50mm)", Supplier 1=DigiKey

## Free pads (board coordinates)
  rrect50% 2.5x5 smd mask+0.102: 18(67,86.5) 18(73.75,87.5)

## Via types
v1: diameter 0.6, hole 0.4, Top Layer to Bottom Layer, tented bottom, 127 vias
v2: diameter 0.6, hole 0.4, Top Layer to Bottom Layer, tented both sides, 83 vias

## Nets (pads, with @x,y where several pads share a name; then routed paths per layer and width w, separated by ;. In a path a pad name is that pad's centre, name@x,y a point inside that pad or via, vN(x,y) a via of type N, cw(c..) or ccw(c..) an arc to the next point about the centre after c; other vN are vias at no path point)
5V: C9.1 C10.2 D15.1 D16.1 IC1.14 IC2.14 IC3.4 IC3.8 IC4.3 J1.1 J2.1 J6.4 R35.1 | length 182.6
  Top Layer w0.6: D16.1@71.5,83.4 71.325,83.225 70.725,83.225 68,80.5 D15.1@68,75.5 64.5,75.5 63,74 63,61.75 62.155,60.905 J6.4@58.05,60.905 61.495,57.46 IC4.3@67.528,57.46 67.65,57.46 68,57.11 68,50.5 C9.1@67.8,50.3 67.8,48.45 69,47.25 75.55,47.25 C10.2@79.1,50.8 ; D16.1@71.5,83.5 71.601,83.601 71.601,84.746 71.65,84.796 71.65,90.15 72.669,91.169 75.052,91.169 v2(75.61,90.611) 75.61,102.635 77.5,104.525 84.354,104.525 84.705,104.174 J2.1@84.705,102.625 ; C10.2@79.1,51.5 C10.2@79.1,50.8 ; J1.1@79.735,44.45 79.678,44.507 79.678,46.072 79.1,46.65 C10.2@79.1,50.8
  VCC w0.4: v2(89.8,61.7) 89.746,61.7 89.621,61.825 v2(83.25,61.825) 82.381,62.694 82.306,62.694 81.475,63.525 81.475,68.975 88.7,76.2 v2(89.8,76.2)
  Bottom Layer w0.4: IC3.8@75.41,87.75 75.41,89.511 75.61,89.711 v2(75.61,90.611) 75.61,90.665 v2@75.648,90.703 ; v2@75.66,90.765 78.319,90.765 78.553,90.999 78.553,92.133 79.22,92.8 IC3.4@79.22,93.35 79.245,93.375 82.741,93.375 82.975,93.141 R35.1@82.975,91.975 ; J1.1@79.735,44.45 79.563,44.622 79.563,45.047 79.475,45.134 79.475,53.5 82.875,56.9 87.5,56.9 89.475,58.875 89.475,61.148 89.762,61.435 89.762,61.662 v2(89.8,61.7) ; v2(83.25,61.825) 83.25,61.879 83.792,62.421 83.792,62.442 84.075,62.725 85.904,62.725 86.55,63.371 IC1.14@86.55,65.696 ; IC2.14@86.535,77.4 88.573,77.4 89.773,76.2 v2(89.8,76.2)
+1: D1.1 D2.2 D3.2 D4.1 J7.1 Q7.2 Q8.2 | length 25.4
  Top Layer w0.4: D3.2@124.25,107.5 D4.1@124.25,104 124.25,102.75 125,102 127,102 128,101 Q8.2@128,98
  Top Layer w0.6: J7.1@139,83.765 139,84.82 140.25,86.07 140.25,92.442 D2.2@140.325,92.517 D1.1@140.325,96.35
  other v1: 99,90 131.5,90 131.5,90.75 99,91 131.5,91.5 99,92 131.5,92.25 99,93 131.5,93 131.5,93.75 99,94 100,94 131.5,94.5 99,95 100,95 131.5,95.25 99,96 100,96 131.5,96 131.5,96.75 99,97 100,97 131.5,97.5 131.5,98.25 131.5,99 131.5,99.75
+2: D7.1 D8.2 D9.2 D10.1 J7.3 Q23.2 Q24.2 | length 69.8
  Top Layer w0.4: D10.1@122.25,40.5 D9.2@122.25,43.75 122,44 122,58.5 122,64.25 122.634,64.884 125.884,64.884 Q24.2@127.5,66.5 ; Q24.2@125.75,62.25 v1(131.5,62.25)
  Top Layer w0.8: J7.3@139,68.525 142.475,68.525 143.75,67.25 143.75,46.75 142.667,45.667 D8.2@140.183,45.667 140.25,45.6 D7.1@140.25,41.75
  other v1: 99,61.5 131.5,61.5 99,62.5 131.5,63 99,63.5 131.5,63.75 99,64.5 131.5,64.5 131.5,65.25 99,65.5 100,65.5 131.5,66 99,66.5 100,66.5 131.5,66.75 99,67.5 100,67.5 131.5,67.5 131.5,68.25 99,68.5 100,68.5 131.5,69 131.5,69.75 131.5,70.5 131.5,71.25
-1: D5.1 D6.2 J7.2 Q9.2 Q10.2 R9.2 | length 66.2
  Top Layer w0.4: Q10.2@127.5,81.5 128.56,82.56 132.31,82.56 132.5,82.75 132.5,106.75 132.05,107.2 130.625,107.2 R9.2@130.25,107.575
  Top Layer w0.8: J7.2@139,76.145 142.395,76.145 143,76.75 143,99.75 142.35,100.4 D5.1@140.325,100.4 140.25,100.475 D6.2@140.25,104.25
  other v1: 99,76.5 131.604,76.535 131.5,77.25 99,77.5 131.5,78 99,78.5 131.5,78.75 99,79.5 131.5,79.5 131.5,80.25 99,80.5 100,80.5 131.5,81 99,81.5 100,81.5 131.5,81.75 99,82.5 100,82.5 131.5,82.5 131.5,83.25 99,83.5 100,83.5 131.5,84 131.5,84.75 131.5,85.5 131.5,86.25
-2: D11.1 D12.2 J7.4 Q25.2 Q26.2 R26.2 | length 19.1
  Top Layer w0.4: R26.2@128.5,43.575 128.5,47.7 128.8,48 v1(131.5,48)
  Top Layer w1: J7.4@139,60.905 139.67,60.235 139.67,58.58 140.25,58 D11.1@140.25,53.5 140.25,49.65 cw(c140.183,49.65) D12.2@140.183,49.583
  other v1: 99,48 131.5,48.75 99,49 131.5,49.5 99,50 100,50 131.5,50.25 99,51 100,51 131.5,51 131.5,51.75 99,52 100,52 131.5,52.5 99,53 100,53 131.5,53.25 99,54 100,54 131.5,54.75 131.5,55.5 131.5,56.25 131.5,57 131.5,57.75
GND: C1.2 C2.1 C3.2 C4.1 C5.1 C6.1 C7.2 C8.1 C9.2 C10.1 D2.1 D6.1 D8.1 D12.1 IC1.7 IC2.7 IC3.1 IC4.2 J1.3 J2.3 J6.2 J6.3 Q1.2 Q2.2 Q4.3 Q6.3 Q11.3 Q12.3 Q15.2 Q16.2 Q17.2 Q18.2 Q20.3 Q22.3 Q27.3 Q28.3 Q31.2 Q32.2 R3.1 R4.1 R14.1 R15.1 R20.1 R21.1 R31.1 R32.1 R36.1 R37.1 R38.1 R39.1 R40.1 | length 249.1
  Top Layer w0.6: D6.1@136.25,104.25 v2(136.25,106.25)
  Top Layer w0.8: v2(73.5,48.75) C9.2@73.5,50.3 73.5,54.5 78,59 IC4.2@78,60 ; C7.2@73.825,69.925 76.843,69.925 v2(77.198,70.28) 77.198,60.802 IC4.2@78,60 ; v2(74.5,82) 73.925,81.425 73.925,79.9 R40.1@73.75,79.725 75.85,79.725 76.5,79.075 76.5,77.5 77,77 C4.1@79.6,77 C2.1@79.6,73.25 C8.1@79.6,69.758 ; 77.47,70.008 79.35,70.008 79.6,69.758 C8.1@79.6,69.5 ; v2(83.1,51.7) 82.1,51.7 C10.1@81.9,51.5 ; J1.3@84.815,44.45 84.75,44.515 84.75,46 84.25,46.5 83,46.5 81.9,47.6 C10.1@81.9,51.5 ; IC4.2@78,60 81.9,56.1 C10.1@81.9,51.5
  Top Layer w1: D8.1@136.183,45.667 D12.1@136.183,49.583 ; D6.1@136.25,104.25 135.9,103.9 134.336,103.9 133.75,103.314 133.75,93.452 134.336,92.867 135.975,92.867 D2.1@136.325,92.517
  Bottom Layer w0.4: v2(69.3,60.7) 69.3,60.754 69.675,61.129 R36.1@69.675,67.058 R37.1@69.675,70.842 R38.1@69.675,74.625 ; v2(71.8,59) 71.762,59.038 71.762,59.838 71.75,59.85 71.75,60.25 72.5,61 75.151,61 75.926,60.225 IC1.7@78.915,60.225 ; v2(74.5,82) 74.554,82 74.729,82.175 C6.1@77.25,82.175 ; IC3.1@75.41,93.35 75.41,94.615 74.5,95.525 74.5,99.425 75.05,99.975 76.75,99.975 C5.1@77.2,100.425 77.2,102.075 77.575,102.45 J2.3@79.625,102.45 ; v2(77.75,72) IC2.7@78.915,72 ; Q27.3@103,48.075 105.391,48.075 105.625,48.309 105.625,49.925 105.825,50.125 Q31.2@105.875,50.125 106.875,50.125 106.999,50 107.5,49.5 107.5,47.834 107.734,47.6 R31.1@109.375,47.6 111.4,47.6 112,47 ; Q20.3@103,63.041 105.482,63.041 105.486,63.037 105.719,63.271 105.954,63.505 105.954,65.046 Q17.2@105.875,65.125 106.875,65.125 106.999,65 107.5,64.5 107.5,61.734 107.734,61.5 109.275,61.5 R20.1@109.375,61.6 111.9,61.6 112.25,61.25 ; Q11.3@103,77.25 105.25,77.25 105.75,77.75 ; Q4.3@103,91.541 104.709,91.541 104.75,91.5 105,91.75 105,92.35 105.2,92.55 Q1.2@105.875,92.55 106.45,92.55 106.75,92.25 106.75,90.409 106.984,90.175 R3.1@109.375,90.175 111.766,90.175 112,89.941 ; Q15.2@105.875,79.625 105.75,79.5 105.75,77.75 ; v2(112,46) 112,47 ; v2(112,74.5) 112,75.5 ; v2(112,88.7) 112,89.941 ; v2(112.3,60.2) 112.3,61.2 112.25,61.25 ; Q18.2@118.25,66.7 118.45,66.5 119.016,66.5 119.25,66.266 119.25,64.75 119.25,63.75 120.05,62.95 ; Q16.2@118.25,81.2 118.383,81.067 119.016,81.067 119.25,80.833 119.25,77.75 120.05,76.95 ; Q2.2@118.25,95.7 119.166,95.7 119.4,95.466 119.4,94.184 119.426,94.158 119.426,92.074 119.8,91.7 ; Q32.2@118.75,52.45 118.8,52.45 119.75,51.5 119.75,49 120.45,48.3 ; Q6.3@121.75,91.75 121.7,91.7 119.8,91.7 ; Q28.3@122,48.3 120.45,48.3 ; Q22.3@122,62.95 120.05,62.95 ; Q12.3@122,76.95 120.05,76.95 ; 105.75,77.75 106.25,77.25 106.25,76.5 106.975,75.775 R14.1@109.375,75.775 111.725,75.775 112,75.5 ; 112,47 112.6,47.6 R32.1@115.475,47.6 119.6,47.6 120.3,48.3 120.45,48.3 ; 112,75.5 112.275,75.775 R15.1@115.475,75.775 115.5,75.75 118,75.75 119.2,76.95 120.05,76.95 ; 112,89.941 112.234,90.175 R4.1@115.475,90.175 117.675,90.175 119.2,91.7 119.8,91.7 ; 112.25,61.25 112.6,61.6 R21.1@115.475,61.6 117.85,61.6 119.2,62.95 120.05,62.95
  other v1: 113.5,41.2 110.475,41.225 111.475,41.225 112.475,41.225 113.5,42.2 110.475,42.225 111.475,42.225 112.475,42.225 113.5,43.2 110.475,43.225 111.475,43.225 112.475,43.225
  other v2: 136.25,47.75
NetC5_2: C5.2 IC3.2 IC3.6 J5.2 | length 109.7
  Top Layer w0.6: v2(99.196,102.764) 96.9,100.468 96.9,46.64 J5.2@99.29,44.25
  VCC w0.4: v2(76.557,92.119) 77.611,92.119 77.845,91.885 77.845,89.458 v2(78.278,89.025) ; v2(91,103) 91.675,102.325 94.075,102.325 96.025,104.275 v2(98.625,104.275)
  Bottom Layer w0.4: v2(76.557,92.119) 76.557,92.131 76.632,92.206 76.632,93.302 IC3.2@76.68,93.35 76.68,95.205 76.875,95.4 76.875,97.3 C5.2@77.2,97.625 ; IC3.6@77.95,87.75 77.998,87.798 77.998,88.88 78.143,89.025 78.332,89.025 78.557,89.25 80.825,89.25 82.45,87.625 84.375,87.625 85.175,88.425 85.175,90.35 86.325,91.5 89.325,91.5 91.4,93.575 91.4,95.325 91,95.725 v2(91,103) ; v2(98.625,104.275) 99.196,103.704 v2(99.196,102.764) v2@99.21,102.75
NetC6_2: C6.2 IC3.5 | length 4.6
  Bottom Layer w0.4: C6.2@77.25,84.975 78.986,84.975 79.22,85.209 IC3.5@79.22,87.75
NetD3_1: D3.1 D4.2 R9.1 | length 8
  Top Layer w0.4: D3.1@126,107.5 D4.2@126,104 127.5,104 128,104.5 130.175,104.5 R9.1@130.25,104.425
NetD9_1: D9.1 D10.2 R26.1 | length 7.8
  Top Layer w0.4: D9.1@124,43.75 D10.2@124,40.5 124.075,40.425 R26.1@128.5,40.425
NetD13_1: D13.1 D14.2 IC3.7 R35.2 | length 124.6
  Top Layer w0.6: v2(76.68,89) 76.68,89.605 78.25,91.175 78.25,99.75 79.3,100.8 93.45,100.8 96.05,98.2 96.05,48.901 94.899,47.75 90.25,47.75 88.25,45.75 88.25,40.5 89.025,39.725 D13.1@90.725,39.725 91,40 102,40 102.75,40.75 102.75,42 104,43.25 D14.2@107.25,43.25
  Bottom Layer w0.4: IC3.7@76.68,87.75 v2(76.68,89) 76.68,89.68 77,90 81.925,90 82.75,89.175 R35.2@82.975,89.175
NetD13_2: D13.2 J5.1 | length 6.2
  Top Layer w0.6: D13.2@90.725,43.725 93.975,43.725 94.5,44.25 J5.1@96.75,44.25
NetD14_1: D14.1 J5.3 | length 14.2
  Top Layer w0.6: J5.3@101.83,44.25 103.33,45.75 108.249,45.75 108.6,45.399 108.6,41 107.25,39.65 D14.1@107.25,39.25
NetD16_2: D16.2 R40.2 | length 4.9
  Top Layer w1: R40.2@70.6,79.725 70.6,80.4 70.675,80.475 70.715,80.475 73.175,82.935 73.175,83.425 D16.2@73.25,83.5
NetF1_1: F1.1 J6.1 pad.18@67,86.5 | length 3.4
  Top Layer w0.5: 65.5,87.25 67.075,87.25 v2(67.75,87.925) ; 65.75,88 66.5,88 v2(66.5,87.925)
  other v2: 66.5,85 67.75,85 66.5,85.925 67.75,85.925 66.5,86.925 67.75,86.925
NetIC1_2: IC1.2 IC2.2 | length 15.8
  Bottom Layer w0.4: IC1.2@85.265,60.225 85.265,60.879 85.365,60.979 85.365,61.291 85.599,61.525 86.875,61.525 88.15,62.8 88.15,67.275 87.425,68 85.9,68 85.726,68.174 85.265,68.635 IC2.2@85.265,72
NetIC1_10: IC1.10 IC2.12 | length 20.5
  Bottom Layer w0.4: IC1.10@81.446,65.711 81.446,67.954 79.425,69.975 78.569,69.975 76.575,71.969 76.575,73.388 77.687,74.5 83.125,74.5 83.995,75.37 IC2.12@83.995,77.4
NetJ1_2: J1.2 S2.1 | length 50.4
  Bottom Layer w0.6: S2.1@53.2,52.5 53.332,52.368 53.332,50.832 51.5,49 51.5,44 52.5,43 59.25,43 60.25,42 60.25,38.7 61.5,37.45 80,37.45 82.275,39.725 J1.2@82.275,44.45
NetJ2_2: J2.2 S4.1 | length 43
  Bottom Layer w0.6: S4.1@53.196,99.196 55.5,101.5 60,101.5 61,102.5 61,108.964 61.586,109.55 80.53,109.55 82.165,107.915 J2.2@82.165,102.625
NetJ3_1: J3.1 S1.3 | length 18
  Bottom Layer w0.6: S1.3@63.6,45.5 63.25,45.15 63.25,40 64,39.25 72.731,39.25 73.2,39.719 J3.1@73.2,41.6
NetJ3_2: J3.2 S2.3 | length 14.5
  Bottom Layer w0.6: S2.3@63.2,52.5 63.271,52.429 65.814,52.429 66.4,51.843 66.4,43.4 J3.2@68.2,41.6
NetJ4_1: J4.1 S3.3 | length 17.1
  Bottom Layer w0.6: S3.3@63.2,92.25 65.75,92.25 68.475,94.975 68.475,104.596 67.95,105.121 J4.1@67.95,105.5
NetJ4_2: J4.2 S4.3 | length 20.5
  Bottom Layer w0.6: S4.3@63.25,99.275 63.25,107.25 64.25,108.25 72.364,108.25 72.95,107.664 J4.2@72.95,105.5
NetQ1_1: Q1.1 R1.2 R3.2 | length 8.1
  Bottom Layer w0.4: Q1.1@105.875,94.45 105.925,94.5 106.766,94.5 107,94.266 107,93.5 107.525,92.975 R3.2@109.375,92.975 R1.2@109.375,96.5
NetQ1_3: Q1.3 Q3.1 Q4.1 R5.2 | length 18.6
  Bottom Layer w0.4: R5.2@95.875,89.9 96.217,89.558 96.217,88.659 96.452,88.425 100.225,88.425 101,89.2 Q4.1@101,90.591 ; Q4.1@101,90.5 101,90.541 102.008,91.549 102.008,92.508 102.334,92.834 102.666,92.834 102.75,92.75 103.5,92.75 103.625,92.875 103.625,93.3 103.825,93.5 103.825,96.034 103.85,96.059 103.85,98.066 103.591,98.325 103.2,98.325 Q3.1@103,98.525
NetQ2_1: Q2.1 R2.2 R4.2 | length 6.9
  Bottom Layer w0.4: R2.2@115.475,96.5 R4.2@115.475,92.975 117.766,92.975 118,93.209 118,93.6 118.2,93.8 Q2.1@118.25,93.8
NetQ2_3: Q2.3 Q5.1 Q6.1 R6.2 | length 17
  Bottom Layer w0.4: Q2.3@120.25,94.75 121.5,94.75 ; Q5.1@122,97.55 122,96.2 122.084,96.116 122.084,95.334 121.5,94.75 ; R6.2@128.5,89.925 123.175,89.925 122.75,90.35 122.75,91.75 123.7,92.7 Q6.1@123.75,92.7 123.75,94.166 123.166,94.75 121.5,94.75